# Altium PCB 红外接近开关.PcbDoc
Units mm, origin at the board's own origin, x right, y up, seen from the top; angles counter-clockwise.
Board outline 64 x 58 mm, 2 copper layers (Top Layer, Bottom Layer); 39 components, 0 nets, 103 pads, 0 vias.
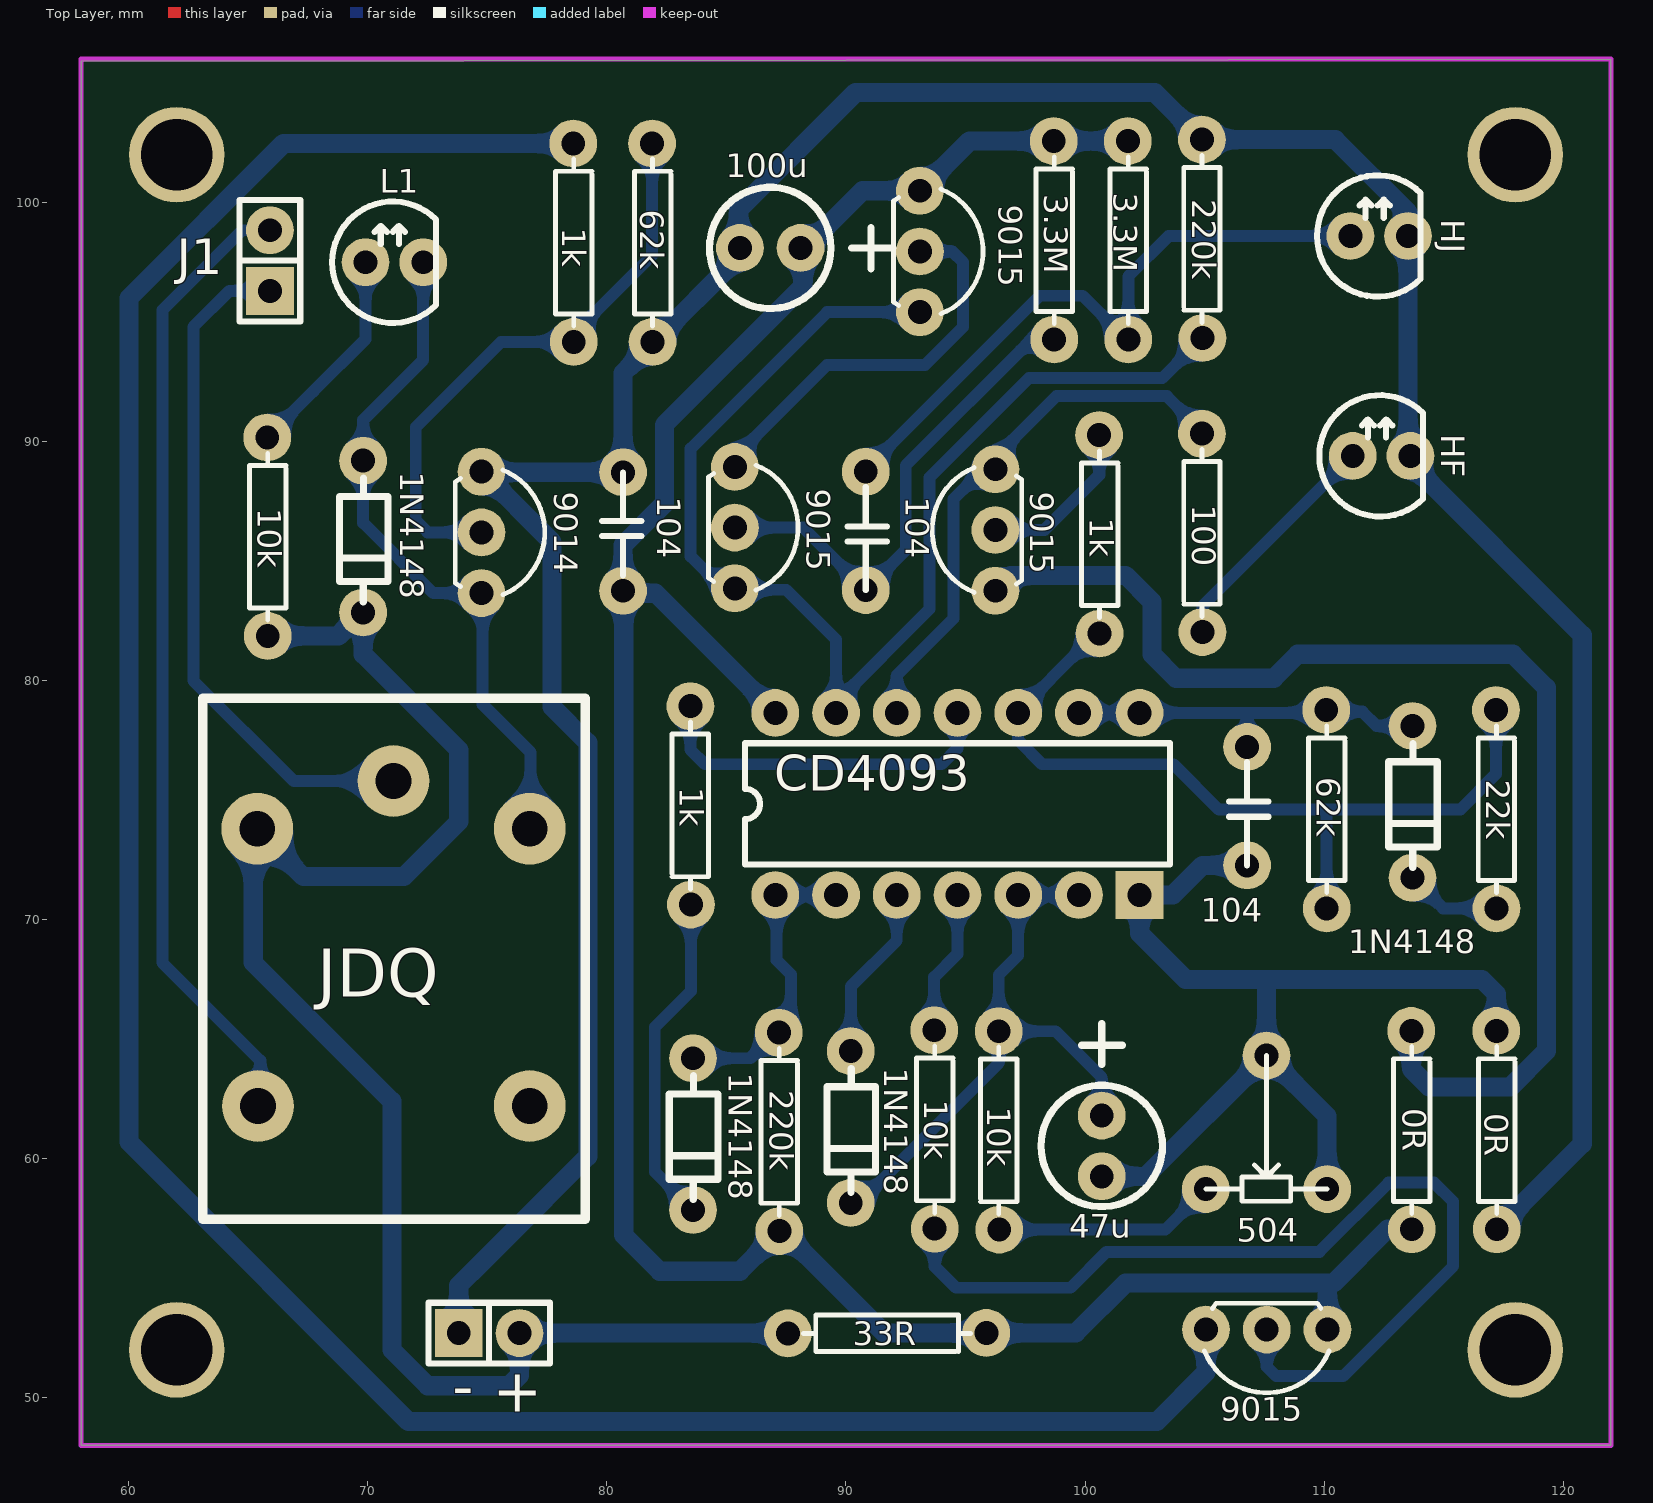
[diagram p0: Top Layer view]
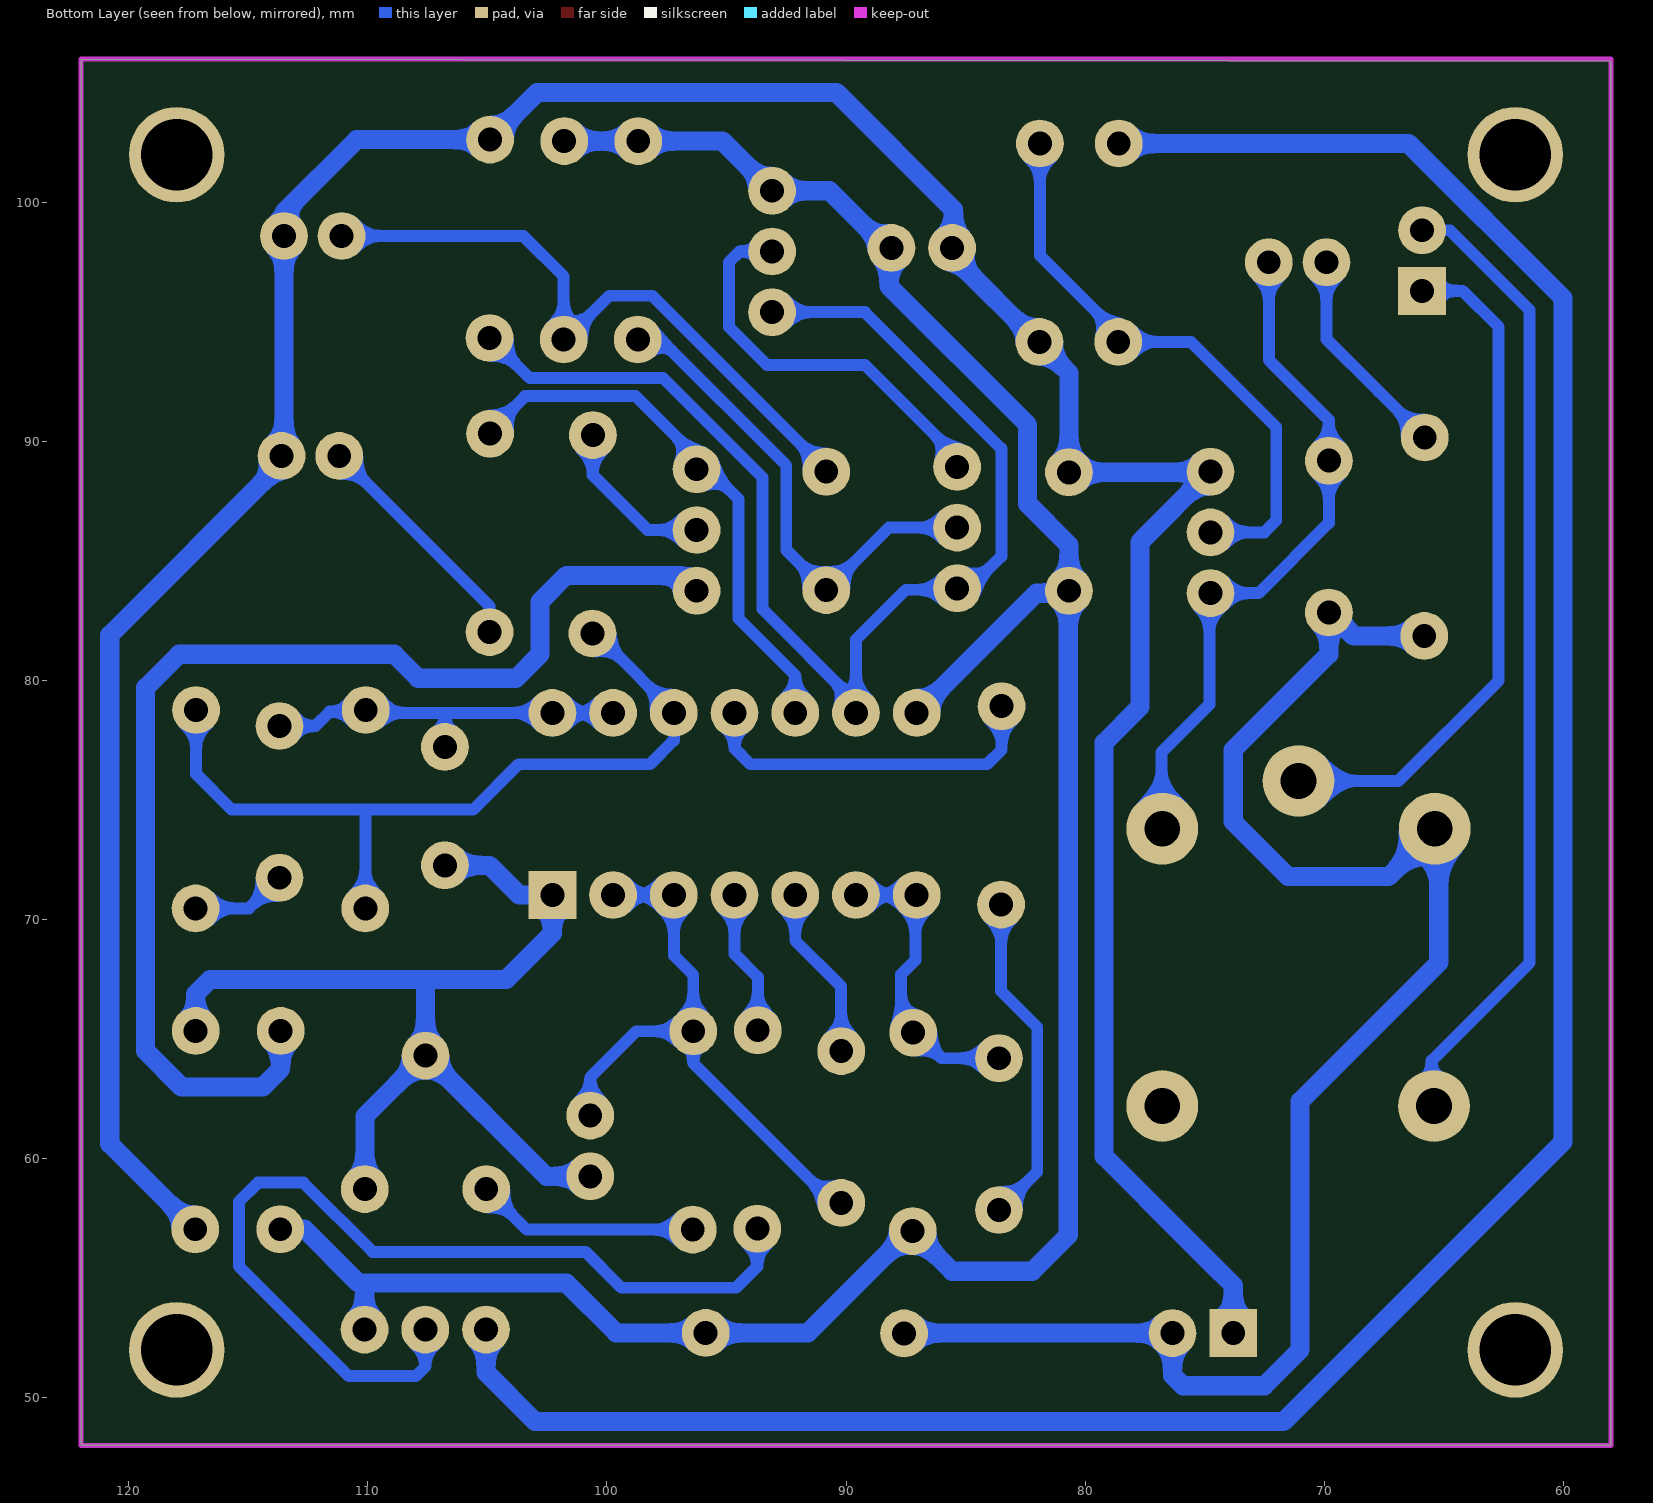
[diagram p1: Bottom Layer view, seen from below]

## Layer stack, top to bottom
Top Solder: solder mask 0.0102, Solder Resist, Dk 3.5
Top Layer: signal copper 0.0356
Dielectric1: dielectric 0.32, FR-4, Dk 4.8
Bottom Layer: signal copper 0.0356
Bottom Solder: solder mask 0.0102, Solder Resist, Dk 3.5

## Board outline
58,105.9 58,48 122,48 122,106

## Design rules (kind name [scope] priority, off if disabled: settings)
Clearance [All] p1: gap=0.254 ignorepadtopadclearanceinfootprint=FALSE except(0: Arc-Hole Track-Hole SMDPad-Hole THPad-Hole Via-Hole Fill-Hole Poly-Hole Region-Hole Text-Hole)
DiffPairsRouting [All] p1: maxlimit=0.254 minlimit=0.254 mostfreqgap=0.254 toplayer_minwidth=0.3 toplayer_maxwidth=2 toplayer_prefwidth=0.5 bottomlayer_minwidth=0.3 bottomlayer_maxwidth=2 bottomlayer_prefwidth=0.5 maxuncoupledlength=12.7
HoleSize [All] p1: absolutevalues=TRUE maxlimit=4 minlimit=0.025 maxpercent=80.000 minpercent=20.000
PolygonConnect [All] p1: connectstyle=Relief reliefconductorwidth=0.254 reliefentries=4 polygonreliefangle="90 Angle" airgapwidth=0.254
RoutingVias [All] p1: holewidth=1 width=2 viastyle="Through Hole" minholewidth=0.7 minwidth=1.5 maxholewidth=4 maxwidth=6
SilkToSolderMaskClearance SilkscreenOverComponentPads [IsPad] p1: minsilkscreentomaskgap=0.254 clearancetoexposedcopper=TRUE
SolderMaskExpansion [All] p1: expansion=0.102 istentingtop=FALSE
UnRoutedNet [All] p1: checkbadconnections=TRUE
Width [All] p1: maxlimit=2 minlimit=0.3 preferedwidth=0.5 minimp=50.000000 maximp=50.000000 favimp=50.000000
26 further rules are at their usual default settings.

## Components (designator, comment, footprint, x,y, rotation, side; value= is the part's Value field where it differs from the comment)
0R "Comment" 电阻 113.46,61.376 r270 top
0R "Comment" 电阻 117.016,61.376 r270 top
1k "Comment" 电阻 100.4,86.3 r270 top
1k "Comment" 电阻 78.4,98.5 r270 top
1k "Comment" 电阻 83.7,74.6 r90 top
1N4148 "Comment" 1n4148 113.7,78.1 r270 top
1N4148 "Comment" 1n4148 90.2,64.5 r270 top
1N4148 "Comment" 1N4148 69.8,89.2 r270 top
1N4148 "Comment" 1n4148 83.6,64.2 r270 top
3.3M "Comment" 电阻 98.5,98.6 r270 top
3.3M "Comment" 电阻 101.6,98.6 r270 top
10k "Comment" 电阻 65.6,86.2 r270 top
10k "Comment" 电阻 96.6,61 r90 top
10k "Comment" 电阻 93.5,61.4 r270 top
22k "Comment" 电阻 117,74.8 r270 top
33R "Comment" 电阻 91.9,52.9 r180 top
47u "Comment" 10UF 100.7,61.8 r270 top
62k "Comment" 电阻 109.9,74.8 r270 top
62k "Comment" 电阻 81.7,98.5 r270 top
100 "Comment" 电阻 105.1,86 r90 top
100u "Comment" 10UF 88.1,98.1 r180 top
104 "Comment" 陶瓷电容 90.9,86.1 r270 top
104 "Comment" 陶瓷电容 80.6,86.4 r90 top
104 "Comment" 陶瓷电容 106.856,74.584 r270 top
220k "Comment" 电阻 105.1,98.3 r90 top
220k "Comment" 电阻 87,61.3 r270 top
504 "Comment" 电位器 107.6,60.9 r0 top
9014 "Comment" PNP三极管 74.8,86.2 r180 top
9015 "Comment" PNP三极管 96.2,86.3 r0 top
9015 "Comment" PNP三极管 85.4,86.4 r180 top
9015 "Comment" PNP三极管 107.6,52.8 r90 top
9015 "Comment" PNP三极管 93.14,97.952 r180 top
"+ -" "Comment" SIP2 73.8,52.7 r0 top
CD4093 "Comment" DIP14 87.044,71.028 r90 top
HF "Comment" LED 111.2,89.4 r0 top
HJ "Comment" LED 111.1,98.6 r0 top
J1 "Comment" SIP2 65.9,96.3 r90 top
JDQ "Comment" PCBComponent_1 76.8,73.8 r180 top
L1 "Comment" LED 69.9,97.5 r0 top

## Footprints (in the part's own frame and the unit in brackets; to place one, negate y for a bottom-side part, rotate by r counter-clockwise, add the part's x,y. Pads: shape width x height; smd on the part's side, far side on the other; paste and mask are expansions set on the pad)
1n4148 [mm]
  round 2 hole 1 mask+0.102: 1(0,0) 2(6.35,0)
  silkscreen extent 0.73,-0.99 5.91,1.04
1N4148 [mm]
  round 2 hole 1 mask+0.102: 1(0,0) 2(6.35,0)
  silkscreen extent 0.73,-0.99 5.91,1.04
10UF [mm]
  round 2 hole 1 mask+0.102: 1(0,0) 2(2.54,0)
  silkscreen extent -3.85,-2.54 3.81,2.54
DIP14 [mm]
  round 2 hole 1 mask+0.102: 1(0,0) 2(0,-2.54) 3(0,-5.08) 4(0,-7.62) 5(0,-10.16) 6(0,-12.7) 8(7.62,-15.24) 9(7.62,-12.7) 10(7.62,-10.16) 11(7.62,-7.62) 12(7.62,-5.08) 13(7.62,-2.54) 14(7.62,0)
  rect 2x2 hole 1 mask+0.102: 7(0,-15.24)
  silkscreen extent 1.27,-16.51 6.35,1.27
LED [mm]
  round 2 hole 1 mask+0.102: 1(0,0) 2(2.413,0)
  silkscreen extent -1.4,-2.54 2.94,2.54
PCBComponent_1 [mm]
  round 3 hole 1.5 mask+0.102: 1(0.03,0) 2(5.73,-2) 3(11.43,0) 4(0.03,11.6) 5(11.4,11.6)
  silkscreen extent -2.29,-5.46 13.71,16.34
PNP三极管 [mm]
  round 2 hole 1 mask+0.102: B(0.049,0) C(0.049,2.54) E(0.049,-2.54)
  silkscreen extent -2.59,-2.61 1.15,2.61
SIP2 [mm]
  rect 2x2 hole 1 mask+0.102: 1(0,0)
  round 2 hole 1 mask+0.102: 2(2.54,0)
  silkscreen extent -1.27,-1.27 3.81,1.27
电位器 [mm]
  round 2 hole 1 mask+0.102: 1(-0.01,3.413) 2(-2.55,-2.175) 3(2.53,-2.175)
  silkscreen extent -2.55,-2.68 2.53,3.41
电阻 [mm]
  round 2 hole 1 mask+0.102: 1(4.33,0.21) 2(-3.97,0.19)
  silkscreen extent -3.31,-0.55 3.67,0.97
陶瓷电容 [mm]
  round 2 hole 1 mask+0.102: 1(-2.64,-0.075) 2(2.313,-0.075)
  silkscreen extent -2,-0.84 2.31,0.81

## Free pads (board coordinates)
  round 4 hole 3: 3(62,102) 4(118,102) 5(118,52) 6(62,52)

## Nets (pads, with @x,y where several pads share a name; then routed paths per layer and width w, separated by ;. In a path a pad name is that pad's centre, name@x,y a point inside that pad or via, vN(x,y) a via of type N, cw(c..) or ccw(c..) an arc to the next point about the centre after c; other vN are vias at no path point)
pads on no net: 0R.1 0R.2 1k.1 1k.2 1N4148.1 1N4148.2 3.3M.1 3.3M.2 10k.1 10k.2 22k.1 22k.2 33R.1 33R.2 47u.1 47u.2 62k.1 62k.2 100.1 100.2 100u.1 100u.2 104.1 104.2 220k.1 220k.2 504.1 504.2 504.3 9014.B 9014.C 9014.E 9015.B 9015.C 9015.E "+ -.1" "+ -.2" CD4093.1 CD4093.2 CD4093.3 CD4093.4 CD4093.5 CD4093.6 CD4093.7 CD4093.8 CD4093.9 CD4093.10 CD4093.11 CD4093.12 CD4093.13 CD4093.14 HF.1 HF.2 HJ.1 HJ.2 J1.1 J1.2 JDQ.1 JDQ.2 JDQ.3 JDQ.4 JDQ.5 L1.1 L1.2
copper on no net: | length 990.1
  Bottom Layer w0.5: 65.5,62.2 65.5,64.1 61.4,68.2 61.4,95.5 64.74,98.84 65.9,98.84 ; 65.79,90.17 67.72,92.1 69.9,94.28 69.9,97.5 ; 65.9,96.3 64.2,96.3 62.7,94.8 62.7,80 66.9,75.8 71.07,75.8 ; 69.8,89.1 69.8,86.6 72.74,83.66 74.8,83.66 74.8,79 76.8,77 76.8,73.8 ; 69.8,89.2 69.8,90.9 72.313,93.413 72.313,97.5 ; 74.751,86.2 72.5,86.2 72,86.7 72,90.6 75.57,94.17 78.61,94.17 ; 78.23,94.13 81.89,97.79 81.89,102.47 ; 83.49,78.83 83.49,77.11 84.1,76.5 94,76.5 94.664,77.164 94.664,78.648 ; 83.51,70.53 83.51,67.01 82,65.5 82,59.45 83.6,57.85 ; 83.6,64.2 86,64.2 87.69,65.89 87.69,67.71 87.1,68.3 87.1,71.3 ; 85.351,86.4 88.212,86.4 90.825,83.787 92.5,85.462 92.5,89 97.77,94.27 98.71,94.27 ; 85.351,89.351 89.2,93.2 93.3,93.2 94.9,94.8 94.9,97.5 94.448,97.952 93.091,97.952 ; 87.044,71.028 89.584,71.028 ; 89.584,79.084 93.5,83 93.5,88.5 97.65,92.65 103.23,92.65 104.91,94.33 ; 89.584,79.284 89.584,78.648 89.584,81.716 87.5,83.8 84.9,83.8 83.5,85.2 83.5,89.7 89.212,95.412 93.091,95.412 ; 90.6,58.2 96.39,63.99 96.39,65.33 ; 90.6,64.5 90.2,64.9 90.2,67.2 92.124,69.124 92.124,71.028 ; 90.825,89.325 91.325,89.325 98.1,96.1 99.9,96.1 101.73,94.27 101.81,94.27 ; 92.124,78.648 92.124,80.224 94.5,82.6 94.5,87.6 98.8,91.9 103.42,91.9 104.89,90.43 ; 93.69,65.37 93.69,67.59 94.664,68.564 94.664,69.264 94.664,71.028 ; 93.71,57.07 93.71,55.49 94.6,54.6 99.4,54.6 100.9,56.1 109.8,56.1 112.7,59 114.6,59 115.4,58.2 115.4,55.5 110.8,50.9 108,50.9 107.6,51.3 107.6,52.849 ; 96.249,86.3 98.3,86.3 100.6,88.6 100.6,89.76 99.99,90.37 ; 96.41,57.03 103.355,57.03 105.05,58.725 ; 99.744,71.028 97.204,71.028 97.204,69.304 97.204,68.504 96.39,67.69 96.39,65.33 ; 99.744,78.648 102.284,78.648 109.968,78.648 ; 99.97,82.07 99.97,81.47 97.204,78.704 97.204,77.496 98.2,76.5 103.7,76.5 105.6,74.6 115.7,74.6 117.19,76.09 117.19,78.77 ; 100.7,61.8 100.7,63.4 98.77,65.33 96.39,65.33 ; 101.81,94.71 101.81,96.91 103.5,98.6 111.1,98.6 ; 104.91,82.03 104.91,83.11 111.2,89.4 ; 106.781,77.224 106.781,78.629 ; 110.11,70.47 110.11,74.59 ; 110.16,78.7 111.6,78.7 112.2,78.1 113.7,78.1 ; 113.7,71.75 114.98,70.47 117.21,70.47
  Bottom Layer w0.8: 65.81,81.87 68.77,81.87 69.8,82.9 69.8,81.1 73.8,77.1 73.8,74.1 71.5,71.8 67.3,71.8 65.2,73.9 65.2,68.2 71,62.4 71,52 72.5,50.5 75.9,50.5 76.34,50.94 76.34,52.7 87.56,52.7 ; 73.8,52.7 73.8,54.7 74.8,55.7 75.7,56.6 79.2,60.1 79.2,77.4 77.7,78.9 77.7,85.8 74.756,88.744 74.787,88.713 80.675,88.713 80.675,92.875 81.91,94.11 ; 78.59,102.47 66.47,102.47 60,96 60,60.7 71.7,49 103,49 105.06,51.06 105.06,52.849 ; 80.675,83.76 80.675,85.675 82.385,87.385 82.4,87.385 82.4,90.7 88.2,96.5 88.2,98 90.692,100.492 93.091,100.492 95.169,102.57 98.69,102.57 101.79,102.57 ; 81.91,94.17 81.91,94.11 ; 85.06,98 85.5,98.44 ; 87.044,78.648 82.035,83.657 80.7,83.657 80.7,56.8 82.21,55.29 85.56,55.29 87.21,56.94 87.21,56.97 ; 87.3,57 91.59,52.71 95.87,52.71 99.61,52.71 101.7,54.8 110.4,54.8 112.646,57.046 113.67,57.046 ; 96.249,83.76 96.889,84.4 101.7,84.4 102.8,83.3 102.8,81.1 103.8,80.1 107.9,80.1 108.9,81.1 117.9,81.1 119.3,79.7 119.3,64.5 117.8,63 114.4,63 113.65,63.75 113.65,65.346 ; 100.7,59.26 102.537,59.26 107.59,64.313 ; 106.781,72.271 104.915,72.271 103.672,71.028 102.284,71.028 102.284,69.416 104.2,67.5 107.4,67.5 116.6,67.5 117.206,66.894 117.206,65.346 ; 107.59,67.49 107.59,64.313 ; 110.13,58.725 110.13,61.773 107.59,64.313 ; 110.14,52.849 110.14,54.74 ; 113.513,89.5 113.513,99.587 110.47,102.63 104.89,102.63 102.92,104.6 90.4,104.6 85.5,99.7 85.5,97.7 81.91,94.11 ; 113.613,89.087 120.8,81.9 ; 117.226,57.046 120.8,60.62 120.8,81.9 ; 120.8,81.7 120.8,81.9

## Keep-outs
Keep-Out Layer:
  lines w0.2: 58,48 58,106 122,106 122,48 58,48